# EAGLE board picostepknobs_dispoffset (EAGLE 9.6.2)
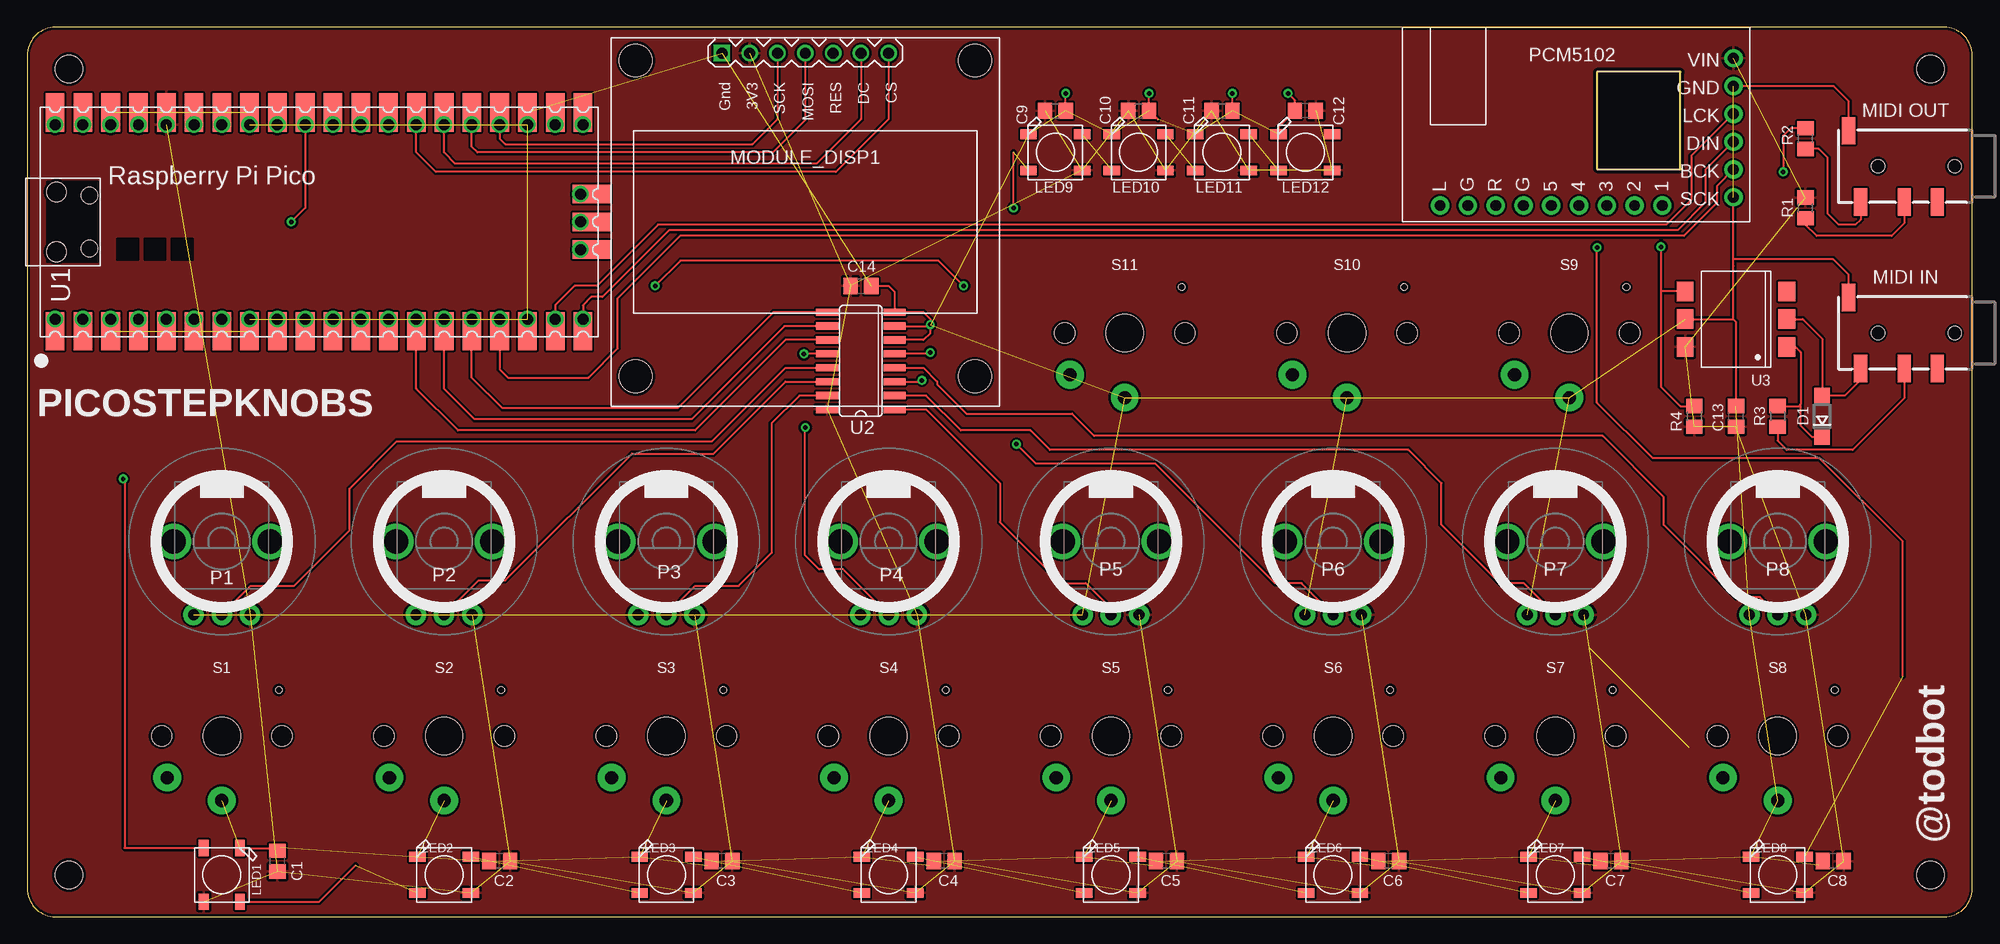
[diagram p0: board, top side]
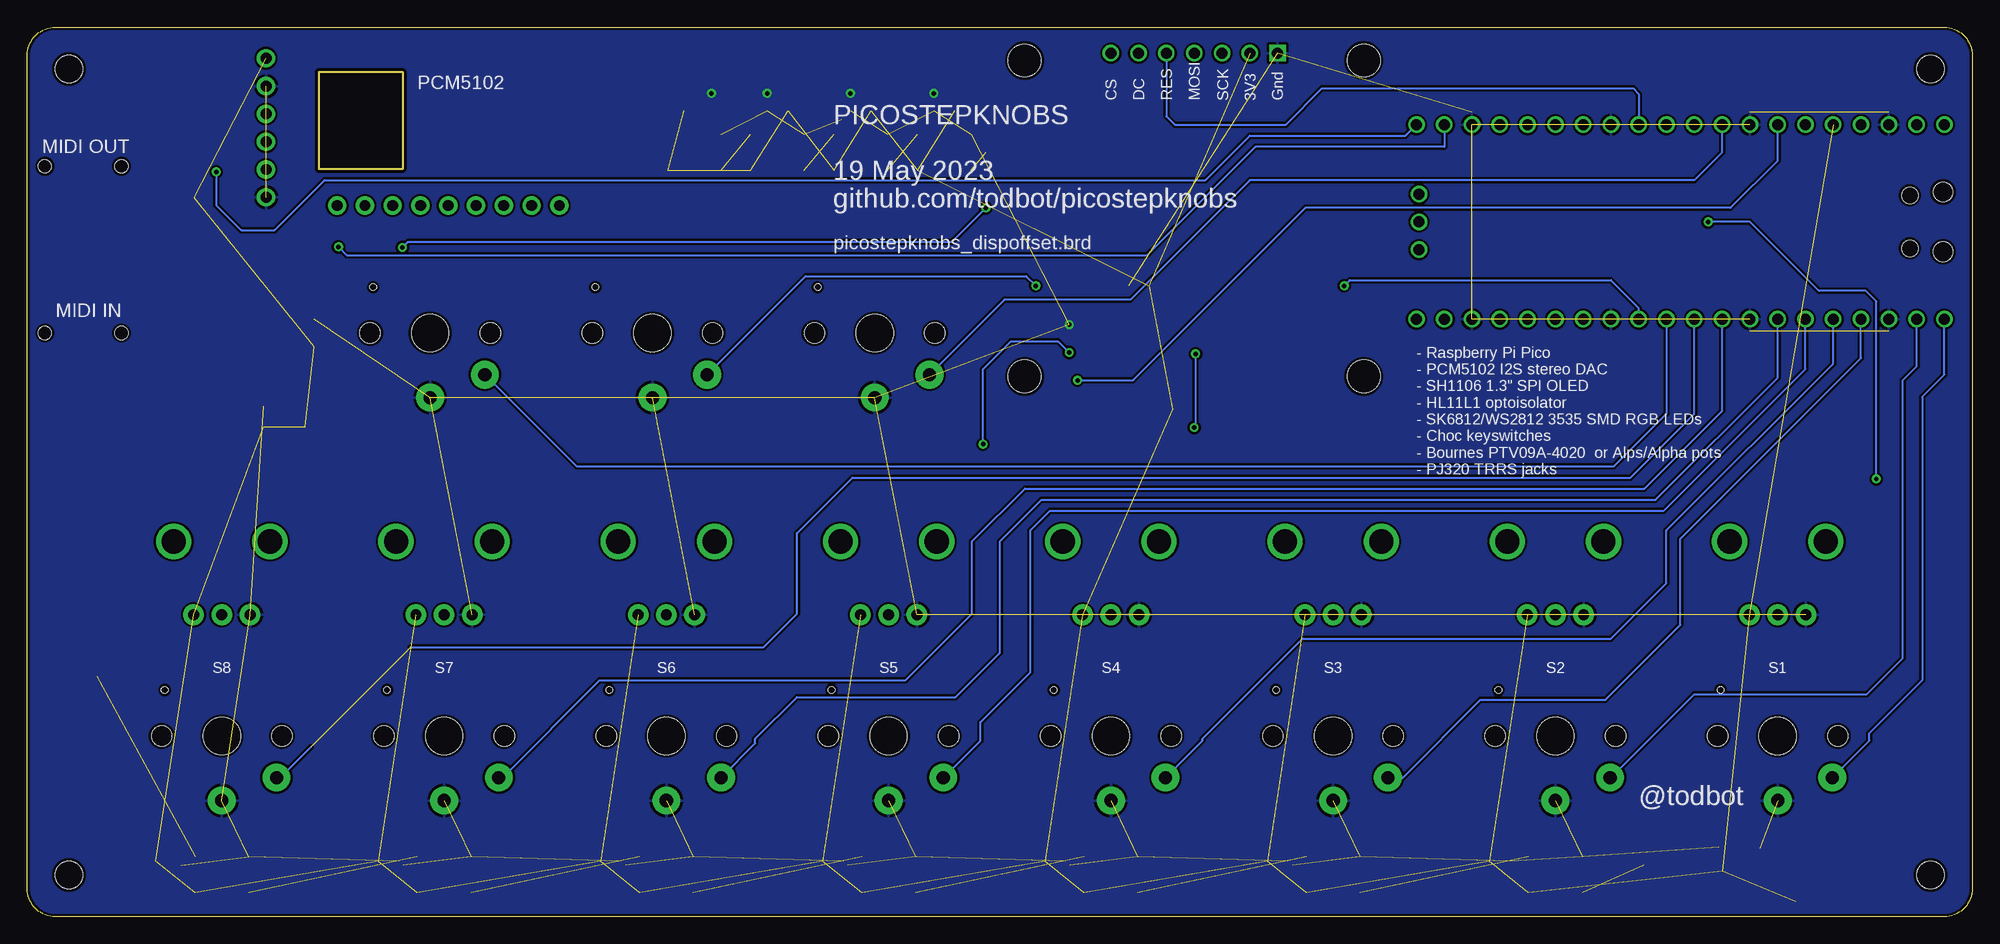
[diagram p1: board, bottom side, seen from below]

Size 177.8 x 81.28 mm. Coordinates in mm from the lower left corner, seen from the top.
Outline: 0,78.74 0,2.54 arc90 2.54,0 175.26,0 arc90 177.8,2.54 177.8,78.74 arc90 175.26,81.28 2.54,81.28 arc90 0,78.74
Outline: 151.13,77.22 143.51,77.22 143.51,68.33 151.13,68.33 151.13,77.22
Copper layers (1*16): Top 0.035mm / dielectric 1.5mm / Bottom 0.035mm
Design rules "adafruit-rules-20180530": minimum track width 8mil, minimum drill 16mil, track to track 8mil, track to pad 8mil, pad to pad 8mil, via to via 8mil, smd to smd 8mil, copper to edge 10mil, drill to drill 8mil, minimum pad ring 10mil, minimum via ring 8mil, stop-mask expansion 4mil, vias tented up to drill 20mil, thermal gap 10mil
Holes 2.54 mm at 3.81,3.81 173.99,3.81 173.99,77.47 3.81,77.47

## Footprints (pad centres in the part's own frame; a part is rotated, then mirrored left to right if it is on the bottom)
C0805 = smd 1.3 x 1.5: 1 -0.95,0; 2 0.95,0
SOD123 = smd 1.4 x 1.4: A 1.9,0; C -1.9,0
PJ-320D_SPARKFUN = smd 1.2 x 2.5: EARTH 11.3,-3.25; RING1 6.2,3.25; RING2 3.2,3.25; TIP 10.2,3.25 | hole 1.2: 1.6,0; 8.6,0
WS2812B = smd 1.5 x 0.9: 1-VDD 2.45,-1.65; 2-DOUT 2.45,1.65; 3-GND -2.45,1.65; 4-DIN -2.45,-1.65
DISPLAY-OLED-128X64-1.3IN = drill 1 square: 1 -7.62,15.43 | drill 1: 2 -5.08,15.43; 3 -2.54,15.43; 4 0,15.43; 5 2.54,15.43; 6 5.08,15.43; 7 7.62,15.43 | hole 3: -15.5,14.75; 15.5,14.75; 15.5,-14.115; -15.5,-14.115
I2S_PCM_5100_SOUNDCARD = drill 1 pad 1.676: 1 1.5,8; 2 1.5,10.54; 3 1.5,13.08; 4 1.5,15.62; 5 1.5,18.16; BCK 4.79,1.5; DIN 7.33,1.5; G1 1.5,20.7; G2 1.5,25.78; GND 12.41,1.5; L 1.5,28.32; LCK 9.87,1.5; R 1.5,23.24; SCK 2.25,1.5; VIN 14.95,1.5
OG-POTS_ALPS_POT_VERTICAL_WITHBIGKNOB = drill 1 pad 1.88: P$1 -2.58,-6.7; P$2 0,-6.7; P$3 2.58,-6.7 | drill 2.2 pad 3.175: P$4 4.4,0; P$5 -4.4,0
R0805 = smd 1.3 x 1.5: 1 -0.95,0; 2 0.95,0
CHOC-1U = drill 1.2 pad 2.54: CHOC1 0,5.9; CHOC2 5,3.8 | hole 3.4: 0,0 | hole 0.6: -5.22,-4.2 | hole 1.85: -5.5,0; 5.5,0
PICO-PKG = drill 1: 1 -8.89,24.13; 2 -8.89,21.59; 3 -8.89,19.05; 4 -8.89,16.51; 5 -8.89,13.97; 6 -8.89,11.43; 7 -8.89,8.89; 8 -8.89,6.35; 9 -8.89,3.81; 10 -8.89,1.27; 11 -8.89,-1.27; 12 -8.89,-3.81; 13 -8.89,-6.35; 14 -8.89,-8.89; 15 -8.89,-11.43; 16 -8.89,-13.97; 17 -8.89,-16.51; 18 -8.89,-19.05; 19 -8.89,-21.59; 20 -8.89,-24.13; 21 8.89,-24.13; 22 8.89,-21.59; 23 8.89,-19.05; 24 8.89,-16.51; 25 8.89,-13.97; 26 8.89,-11.43; 27 8.89,-8.89; 28 8.89,-6.35; 29 8.89,-3.81; 30 8.89,-1.27; 31 8.89,1.27; 32 8.89,3.81; 33 8.89,6.35; 34 8.89,8.89; 35 8.89,11.43; 36 8.89,13.97; 37 8.89,16.51; 38 8.89,19.05; 39 8.89,21.59; 40 8.89,24.13; 41 -2.54,-23.9; 42 0,-23.9; 43 2.54,-23.9 | smd 3.5 x 1.7: P$1 -10,24.13; P$2 -10,21.59; P$3 -10,19.05; P$4 -10,16.51; P$5 -10,13.97; P$6 -10,11.43; P$7 -10,8.89; P$8 -10,6.35; P$9 -10,3.81; P$10 -10,1.27; P$11 -10,-1.27; P$12 -10,-3.81; P$13 -10,-6.35; P$14 -10,-8.89; P$15 -10,-11.43; P$16 -10,-13.97; P$17 -10,-16.51; P$18 -10,-19.05; P$19 -10,-21.59; P$20 -10,-24.13; P$21 10,-24.13; P$22 10,-21.59; P$23 10,-19.05; P$24 10,-16.51; P$25 10,-13.97; P$26 10,-11.43; P$27 10,-8.89; P$28 10,-6.35; P$29 10,-3.81; P$30 10,-1.27; P$31 10,1.27; P$32 10,3.81; P$33 10,6.35; P$34 10,8.89; P$35 10,11.43; P$36 10,13.97; P$37 10,16.51; P$38 10,19.05; P$39 10,21.59; P$40 10,24.13 | smd 1.7 x 3.5: P$41 -2.54,-24.925; P$42 0,-24.925; P$43 2.54,-24.925 | hole 1.8: -2.725,24; 2.725,24 | hole 1.5: -2.425,20.97; 2.425,20.97
SO16 = smd 0.66 x 2.032: 1 -4.445,-3.073; 2 -3.175,-3.073; 3 -1.905,-3.073; 4 -0.635,-3.073; 5 0.635,-3.073; 6 1.905,-3.073; 7 3.175,-3.073; 8 4.445,-3.073; 9 4.445,3.073; 10 3.175,3.073; 11 1.905,3.073; 12 0.635,3.073; 13 -0.635,3.073; 14 -1.905,3.073; 15 -3.175,3.073; 16 -4.445,3.073
DIL6-SMD = smd 1.78 x 1.52: 1 -2.54,-4.645; 2 0,-4.645; 3 2.54,-4.645; 4 2.54,4.645; 5 0,4.645; 6 -2.54,4.645

## Placement (x,y rotation side)
C1  100n  [C0805]  22.86,5.08 90 top
C2  100n  [C0805]  43.18,5.08 180 top
C3  100n  [C0805]  63.5,5.08 180 top
C4  100n  [C0805]  83.82,5.08 180 top
C5  100n  [C0805]  104.14,5.08 180 top
C6  100n  [C0805]  124.46,5.08 180 top
C7  100n  [C0805]  144.78,5.08 180 top
C8  100n  [C0805]  165.1,5.08 180 top
C9  100n  [C0805]  93.98,73.66 0 top
C10  100n  [C0805]  101.6,73.66 0 top
C11  100n  [C0805]  109.22,73.66 0 top
C12  100n  [C0805]  116.84,73.66 180 top
C13  100n  [C0805]  156.21,45.72 90 top
C14  100n  [C0805]  76.2,57.66 0 top
D1  1N4148  [SOD123]  164.08,45.72 90 top
J1  AUDIO-JACK-TRRS  [PJ-320D_SPARKFUN]  177.8,68.58 180 top
J2  AUDIO-JACK-TRRS  [PJ-320D_SPARKFUN]  177.8,53.34 180 top
LED1  WS2812B5050  [WS2812B]  17.78,3.81 270 top
LED2  WS2812B5050  [WS2812B]  38.1,3.81 0 top
LED3  WS2812B5050  [WS2812B]  58.42,3.81 0 top
LED4  WS2812B5050  [WS2812B]  78.74,3.81 0 top
LED5  WS2812B5050  [WS2812B]  99.06,3.81 0 top
LED6  WS2812B5050  [WS2812B]  119.38,3.81 0 top
LED7  WS2812B5050  [WS2812B]  139.7,3.81 0 top
LED8  WS2812B5050  [WS2812B]  160.02,3.81 0 top
LED9  WS2812B5050  [WS2812B]  93.98,69.85 0 top
LED10  WS2812B5050  [WS2812B]  101.6,69.85 0 top
LED11  WS2812B5050  [WS2812B]  109.22,69.85 0 top
LED12  WS2812B5050  [WS2812B]  116.84,69.85 0 top
MODULE_DISP1  DISPLAY-OLED-128X64-1.3IN  [DISPLAY-OLED-128X64-1.3IN]  71.12,63.5 0 top
MODULE_PCM5102A  I2S_PCM_51XX_SOUNDCARD  [I2S_PCM_5100_SOUNDCARD]  157.48,63.5 90 top
P1  10k  [OG-POTS_ALPS_POT_VERTICAL_WITHBIGKNOB]  17.78,34.29 0 top
P2  10k  [OG-POTS_ALPS_POT_VERTICAL_WITHBIGKNOB]  38.1,34.29 0 top
P3  10k  [OG-POTS_ALPS_POT_VERTICAL_WITHBIGKNOB]  58.42,34.29 0 top
P4  10k  [OG-POTS_ALPS_POT_VERTICAL_WITHBIGKNOB]  78.74,34.29 0 top
P5  10k  [OG-POTS_ALPS_POT_VERTICAL_WITHBIGKNOB]  99.06,34.29 0 top
P6  10k  [OG-POTS_ALPS_POT_VERTICAL_WITHBIGKNOB]  119.38,34.29 0 top
P7  10k  [OG-POTS_ALPS_POT_VERTICAL_WITHBIGKNOB]  139.7,34.29 0 top
P8  10k  [OG-POTS_ALPS_POT_VERTICAL_WITHBIGKNOB]  160.02,34.29 0 top
R1  33  [R0805]  162.56,64.77 90 top
R2  10  [R0805]  162.56,71.12 90 top
R3  220  [R0805]  160.02,45.72 270 top
R4  4.7k  [R0805]  152.4,45.72 90 top
S1  KEYSWITCH-PLAIN-CHOC-1U  [CHOC-1U]  17.78,16.51 180 top
S2  KEYSWITCH-PLAIN-CHOC-1U  [CHOC-1U]  38.1,16.51 180 top
S3  KEYSWITCH-PLAIN-CHOC-1U  [CHOC-1U]  58.42,16.51 180 top
S4  KEYSWITCH-PLAIN-CHOC-1U  [CHOC-1U]  78.74,16.51 180 top
S5  KEYSWITCH-PLAIN-CHOC-1U  [CHOC-1U]  99.06,16.51 180 top
S6  KEYSWITCH-PLAIN-CHOC-1U  [CHOC-1U]  119.38,16.51 180 top
S7  KEYSWITCH-PLAIN-CHOC-1U  [CHOC-1U]  139.7,16.51 180 top
S8  KEYSWITCH-PLAIN-CHOC-1U  [CHOC-1U]  160.02,16.51 180 top
S9  KEYSWITCH-PLAIN-CHOC-1U  [CHOC-1U]  140.97,53.34 180 top
S10  KEYSWITCH-PLAIN-CHOC-1U  [CHOC-1U]  120.65,53.34 180 top
S11  KEYSWITCH-PLAIN-CHOC-1U  [CHOC-1U]  100.33,53.34 180 top
U1  RASPBERRY_PICOSMD-TH  [PICO-PKG]  26.67,63.5 90 top
U2  4051D  [SO16]  76.2,50.8 90 top
U3  H11L1MS  [DIL6-SMD]  156.21,54.61 90 top

## Library data of the parts
C1-C14 = rcl; SPICEPREFIX: C
D1 = diode
J1 J2 = audio_jacks_todbot; LCSC: C431535; MPN: PJ-320D
LED1-LED12 MODULE_DISP1 = todstuff2023
MODULE_PCM5102A = PCM5102A
P1-P8 = EurorackModularParts
R1-R4 = rcl; SPICEPREFIX: R
S1-S11 = Keyboard
U1 = RpiPico
U2 = 40xx
U3 = optocoupler; LCSC: C78589; MPN2: H11L1S; OC_FARNELL: unknown; OC_NEWARK: unknown

## Nets
+3V3: C1.1 C2.1 C3.1 C4.1 C5.1 C6.1 C7.1 C8.1 C9.1 C10.1 C11.1 C12.1 C13.1 C14.1 LED1.1-VDD LED2.1-VDD LED3.1-VDD LED4.1-VDD LED5.1-VDD LED6.1-VDD LED7.1-VDD LED8.1-VDD LED9.1-VDD LED10.1-VDD LED11.1-VDD LED12.1-VDD MODULE_DISP1.2 MODULE_PCM5102A.VIN P1.P$3 P2.P$3 P3.P$3 P4.P$3 P5.P$3 P6.P$3 P7.P$3 P8.P$3 R1.2 R4.1 U1.36 U1.P$36 U2.16 U3.6
DISP_CS: MODULE_DISP1.7 U1.27 U1.P$27
DISP_DC: MODULE_DISP1.6 U1.26 U1.P$26
DISP_MOSI: MODULE_DISP1.4 U1.25 U1.P$25
DISP_RES: MODULE_DISP1.5 U1.29 U1.P$29
DISP_SCLK: MODULE_DISP1.3 U1.24 U1.P$24
GND: C1.2 C2.2 C3.2 C4.2 C5.2 C6.2 C7.2 C8.2 C9.2 C10.2 C11.2 C12.2 C13.2 C14.2 J1.EARTH J2.EARTH LED1.3-GND LED2.3-GND LED3.3-GND LED4.3-GND LED5.3-GND LED6.3-GND LED7.3-GND LED8.3-GND LED9.3-GND LED10.3-GND LED11.3-GND LED12.3-GND MODULE_DISP1.1 MODULE_PCM5102A.GND MODULE_PCM5102A.SCK P1.P$1 P2.P$1 P3.P$1 P4.P$1 P5.P$1 P6.P$1 P7.P$1 P8.P$1 S1.CHOC1 S2.CHOC1 S3.CHOC1 S4.CHOC1 S5.CHOC1 S6.CHOC1 S7.CHOC1 S8.CHOC1 S9.CHOC1 S10.CHOC1 S11.CHOC1 U1.3 U1.8 U1.13 U1.18 U1.23 U1.28 U1.33 U1.38 U1.P$3 U1.P$8 U1.P$13 U1.P$18 U1.P$23 U1.P$28 U1.P$33 U1.P$38 U2.6 U2.7 U2.8 U3.5
I2S_BCLK: MODULE_PCM5102A.BCK U1.17 U1.P$17
I2S_DIN: MODULE_PCM5102A.DIN U1.20 U1.P$20
I2S_LCK: MODULE_PCM5102A.LCK U1.19 U1.P$19
MIDI_IN: R4.2 U1.22 U1.P$22 U3.4
MIDI_OUT: R2.2 U1.21 U1.P$21
N$1: LED1.2-DOUT LED2.4-DIN
N$2: LED2.2-DOUT LED3.4-DIN
N$3: U1.37 U1.P$37
N$4: LED3.2-DOUT LED4.4-DIN
N$5: U1.30 U1.P$30
N$6: U1.35 U1.P$35
N$7: U1.40 U1.P$40
N$8: U1.39 U1.P$39
N$9: J1.TIP R2.1
N$10: LED4.2-DOUT LED5.4-DIN
N$11: LED5.2-DOUT LED6.4-DIN
N$12: LED6.2-DOUT LED7.4-DIN
N$13: LED7.2-DOUT LED8.4-DIN
N$14: LED9.2-DOUT LED10.4-DIN
N$15: LED10.2-DOUT LED11.4-DIN
N$16: LED11.2-DOUT LED12.4-DIN
N$17: LED8.2-DOUT LED9.4-DIN
N$18: U1.41 U1.P$41
N$19: U1.42 U1.P$42
N$20: U1.43 U1.P$43
N$38: J1.RING1 R1.1
N$47: D1.C R3.1 U3.1
N$48: D1.A J2.TIP U3.2
N$49: J2.RING1 R3.2
NEOPIXEL: LED1.4-DIN U1.31 U1.P$31
POT1: P1.P$2 U2.13
POT2: P2.P$2 U2.14
POT3: P3.P$2 U2.15
POT4: P4.P$2 U2.12
POT5: P5.P$2 U2.1
POT6: P6.P$2 U2.5
POT7: P7.P$2 U2.2
POT8: P8.P$2 U2.4
POT_IN: U1.34 U1.P$34 U2.3
POTSELA: U1.14 U1.P$14 U2.11
POTSELB: U1.15 U1.P$15 U2.10
POTSELC: U1.16 U1.P$16 U2.9
SW1: S1.CHOC2 U1.1 U1.P$1
SW2: S2.CHOC2 U1.2 U1.P$2
SW3: S3.CHOC2 U1.4 U1.P$4
SW4: S4.CHOC2 U1.5 U1.P$5
SW5: S5.CHOC2 U1.6 U1.P$6
SW6: S6.CHOC2 U1.7 U1.P$7
SW7: S7.CHOC2 U1.9 U1.P$9
SW8: S8.CHOC2 U1.10 U1.P$10
SW9: S9.CHOC2 U1.11 U1.P$11
SW10: S10.CHOC2 U1.12 U1.P$12
SW11: S11.CHOC2 U1.32 U1.P$32

## Tracks (layer width: path | path; a pad name or v marks a point on that pad's centre or on a via)
+3V3  (40 unrouted)
  Top 0.203: U1.P$36 U1.36
  pour Top: 178.06,81.36 178.06,0.25 -0.4,0.25 -0.4,81.36
DISP_CS
  Top 0.203: U1.P$27 U1.27 35.56,69.85 37.34,68.07 73.91,68.07 78.74,72.9 MODULE_DISP1.7
DISP_DC
  Top 0.203: U1.P$26 U1.26 38.1,69.85 39.12,68.83 72.14,68.83 76.2,72.9 MODULE_DISP1.6
DISP_MOSI
  Top 0.203: U1.P$25 U1.25 40.64,70.36 41.15,69.85 68.17,69.85 71.12,72.8 MODULE_DISP1.4
DISP_RES
  Top 0.203: U1.P$29 U1.29
  Bottom 0.203: MODULE_DISP1.5 73.66,73.15 72.9,72.39 62.74,72.39 59.44,75.69 30.99,75.69 30.48,75.18 U1.29
DISP_SCLK
  Top 0.203: U1.24 U1.P$24 43.18,71.12 43.69,70.61 66.29,70.61 68.58,72.9 MODULE_DISP1.3
GND  (via drill 0.41)  (52 unrouted)
  Top 0.203: C3.2 62.16,4.68 | C4.2 82.47,4.68 | C5.2 102.8,4.68 | C6.2 123.11,4.68 | C7.2 143.44,4.68 | C8.2 163.75,4.68 | U1.P$23 U1.23 | U1.P$28 U1.28 | U1.P$38 U1.38 | U1.P$33 U1.33 | U1.P$3 U1.3 | U1.P$8 U1.8 | U1.P$18 U1.18 | U1.P$13 U1.13 | J1.EARTH 166.5,74.55 165.14,75.91 MODULE_PCM5102A.GND | v82.55,54.1 82.55,53.34 81.92,52.7 U2.6 | v82.55,54.1 82.55,54.61 81.92,55.24 U2.8 79.27,57.12 78.74,57.66 C14.2 | 155.98,60.07 155.98,59.46 155.96,59.44 155.96,54.61 | 155.98,60.07 MODULE_PCM5102A.SCK | J2.EARTH 166.5,58.67 165.1,60.07 155.98,60.07 | 103.35,72.86 C10.2 v102.55,75.25 | C11.2 v110.17,75.25 | C9.2 v94.93,75.25 | 155.96,54.61 156.21,54.36 C13.2 | U3.5 155.96,54.61 | U2.7 82.42,53.98 v82.55,54.1 | LED1.3-GND 22.63,6.26 C1.2 23.18,6.35 | v115.25,75.25 115.89,74.61 C12.2 114.39,72.16 LED12.3-GND
  pour Bottom: 0,86.17 180.34,86.17 180.34,0.25 0,0.25
I2S_BCLK
  Top 0.203: U1.17 U1.P$17 43.18,50.04 43.94,49.28 51.31,49.28 53.98,51.94 53.98,56.52 59.69,62.23 151.44,62.23 154.46,65.25 154.46,66.77 MODULE_PCM5102A.BCK
I2S_DIN
  Top 0.203: MODULE_PCM5102A.DIN 153.42,68.27 153.42,65.28 150.88,62.74 58.67,62.74 52.58,56.64 51.56,56.64 50.8,55.88 U1.20 U1.P$20
I2S_LCK
  Top 0.203: U1.P$19 U1.19 48.26,55.88 50.04,57.66 52.07,57.66 57.66,63.25 149.86,63.25 152.15,65.53 152.15,69.54 MODULE_PCM5102A.LCK
MIDI_IN  (via drill 0.41)
  Top 0.203: U1.P$22 U1.22 | v149.35,61.21 149.35,57.15 | 149.35,57.15 149.35,48.45 151.13,46.67 R4.2 | U3.4 149.35,57.15
  Bottom 0.203: v149.35,61.21 148.59,60.45 75.44,60.45 65.53,70.36 48.26,70.36 U1.22
MIDI_OUT  (via drill 0.41)
  Top 0.203: U1.P$21 U1.21 | R2.2 161.22,72.07 160.53,71.37 v160.53,68.07
  Bottom 0.203: U1.21 51.82,71.37 66.04,71.37 70.1,67.31 150.62,67.31 155.19,62.74 158.24,62.74 160.53,65.02 v160.53,68.07
N$1  (1 unrouted)
  Top 0.203: LED1.2-DOUT 26.68,1.36 30,4.68
N$2  (1 unrouted)
N$3
  Top 0.203: U1.P$37 U1.37
N$4  (1 unrouted)
N$5
  Top 0.203: U1.P$30 U1.30
N$6
  Top 0.203: U1.P$35 U1.35
N$7
  Top 0.203: U1.P$40 U1.40
N$8
  Top 0.203: U1.P$39 U1.39
N$9
  Top 0.203: J1.TIP 167.6,63.71 167.13,63.25 165.61,63.25 164.59,64.26 164.59,69.34 163.76,70.17 R2.1
N$10  (1 unrouted)
N$11  (1 unrouted)
N$12  (1 unrouted)
N$13  (1 unrouted)
N$14  (1 unrouted)
N$15  (1 unrouted)
N$16  (1 unrouted)
N$17  (via drill 0.41)  (2 unrouted)
  Top 0.203: 171.45,21.98 171.45,34.29 163.83,41.91 148.59,41.91 143.51,46.99 v143.51,61.16 | v90.17,64.77 90.17,69.85
  Bottom 0.203: v143.51,61.16 143,61.67 93.27,61.67 v90.17,64.77
N$18
  Top 0.203: U1.P$41 U1.41
N$19
  Top 0.203: U1.P$42 U1.42
N$20
  Top 0.203: U1.P$43 U1.43
N$38
  Top 0.203: J1.RING1 171.6,63.4 170.43,62.23 163.58,62.23 162.56,63.25 R1.1
N$47
  Top 0.203: R3.1 161.99,46.67 162.12,46.81 | 162.12,46.81 162.12,51.56 161.62,52.07 U3.1 | D1.C 163.19,43.82 162.12,44.88 162.12,46.81
N$48
  Top 0.203: J2.TIP 167.6,49.07 166.15,47.62 D1.A 164.08,52.83 162.31,54.61 U3.2
N$49
  Top 0.203: J2.RING1 171.6,47.39 166.88,42.67 160.85,42.67 160.02,43.5 R3.2
NEOPIXEL  (via drill 0.41)
  Top 0.203: v8.76,40.01 8.89,39.88 8.89,6.26 LED1.4-DIN | U1.P$31 U1.31 25.4,64.77 v24.13,63.5
  Bottom 0.203: v8.76,40.01 8.76,56.23 9.72,57.19 14.01,57.19 20.32,63.5 v24.13,63.5
POT1
  Top 0.203: P1.P$2 20.42,30.23 24.38,30.23 29.46,35.31 29.46,39.12 33.78,43.43 62.59,43.43 69.32,50.16 U2.13
POT2
  Top 0.203: P2.P$2 41.24,30.73 43.69,30.73 55.28,42.32 62.74,42.32 69.32,48.9 U2.14
POT3
  Top 0.203: P3.P$2 61.06,30.23 65.02,30.23 68.05,33.25 68.05,45.09 70.59,47.62 U2.15
POT4  (via drill 0.41)
  Top 0.203: U2.12 v70.99,51.44 | P4.P$2 74.58,31.75 72.39,31.75 71.12,33.02 v71.12,44.7
  Bottom 0.203: v70.99,51.44 70.99,44.83 v71.12,44.7
POT5
  Top 0.203: U2.1 82.17,46.35 88.9,39.62 88.9,36.07 94.49,30.48 96.77,30.48 99.06,28.19 P5.P$2
POT6  (via drill 0.41)
  Top 0.203: P6.P$2 116.49,30.48 114.05,30.48 103.12,41.4 92.2,41.4 v90.42,43.18 | v82.55,51.56 82.42,51.44 U2.5
  Bottom 0.203: v90.42,43.18 90.42,50.04 87.88,52.58 83.57,52.58 v82.55,51.56
POT7
  Top 0.203: P7.P$2 136.81,30.48 134.62,30.48 129.29,35.81 129.29,39.62 126.24,42.67 93.47,42.67 91.69,44.45 85.34,44.45 82.17,47.62 U2.2
POT8
  Top 0.203: P8.P$2 158.4,29.21 156.21,29.21 149.61,35.81 149.61,38.35 144.02,43.94 97.54,43.94 95.5,45.97 85.85,45.97 83.19,48.64 83.19,48.9 81.92,50.16 U2.4
POT_IN  (via drill 0.41)
  Top 0.203: U1.P$34 U1.34 | U2.3 81.66,48.9 v81.79,49.02
  Bottom 0.203: U1.34 17.78,69.09 22.1,64.77 60.96,64.77 76.71,49.02 v81.79,49.02
POTSELA
  Top 0.203: U1.14 U1.P$14 35.56,48.26 39.37,44.45 61.06,44.45 69.32,52.7 U2.11
POTSELB
  Top 0.203: U1.15 U1.P$15 38.1,48.26 40.89,45.47 60.71,45.47 69.22,53.98 U2.10
POTSELC
  Top 0.203: U1.16 U1.P$16 40.64,49.28 43.43,46.48 59.44,46.48 68.2,55.24 U2.9
SW1
  Top 0.203: U1.P$1 U1.1
  Bottom 0.203: U1.1 2.54,49.53 4.57,47.5 4.57,21.59 9.4,16.76 9.4,16.09 S1.CHOC2
SW2
  Top 0.203: U1.P$2 U1.2
  Bottom 0.203: S2.CHOC2 33.01,12.71 25.4,20.32 9.65,20.32 6.35,23.62 6.35,49.02 5.08,50.29 U1.2
SW3
  Top 0.203: U1.P$4 U1.4
  Bottom 0.203: S3.CHOC2 52.06,12.71 44.96,19.81 33.53,19.81 26.67,26.67 26.67,34.54 10.16,51.05 U1.4
SW4
  Top 0.203: U1.P$5 U1.5
  Bottom 0.203: S4.CHOC2 70.36,16.09 70.36,16.26 61.21,25.4 33.02,25.4 27.94,30.48 27.94,35.31 12.7,50.55 U1.5
SW5
  Top 0.203: U1.P$6 U1.6
  Bottom 0.203: S5.CHOC2 90.68,16.09 90.68,17.78 86.11,22.35 86.11,35.31 84.33,37.08 28.19,37.08 15.24,50.04 U1.6
SW6
  Top 0.203: U1.P$7 U1.7
  Bottom 0.203: S6.CHOC2 111.25,15.84 111.25,16.26 107.44,20.07 92.96,20.07 88.9,24.13 88.9,34.29 85.09,38.1 28.96,38.1 17.78,49.28 U1.7
SW7
  Top 0.203: U1.P$9 U1.9
  Bottom 0.203: S7.CHOC2 134.36,12.71 125.48,21.59 97.54,21.59 91.44,27.69 91.44,34.29 86.61,39.12 29.97,39.12 22.86,46.23 U1.9
SW8  (1 unrouted)
  Top 0.203: U1.P$10 U1.10
  Bottom 0.203: S8.CHOC2 154.68,12.71 151.89,15.49 | 142.75,24.64 110.49,24.64 107.44,27.69 107.44,35.05 102.36,40.13 31.24,40.13 25.4,45.97 U1.10
SW9
  Top 0.203: U1.P$11 U1.11
  Bottom 0.203: U1.11 27.94,45.97 32.77,41.15 127.58,41.15 S9.CHOC2
SW10  (via drill 0.41)
  Top 0.203: U1.P$12 U1.12 | v85.6,57.66 83.29,59.97 59.71,59.97 v57.4,57.66
  Bottom 0.203: v85.6,57.66 86.49,58.55 106.64,58.55 S10.CHOC2 | U1.12 30.48,55.63 33.02,58.17 56.9,58.17 v57.4,57.66
SW11
  Top 0.203: U1.P$32 U1.32
  Bottom 0.203: U1.32 22.86,69.85 25.4,67.31 66.04,67.31 76.96,56.39 88.48,56.39 S11.CHOC2

## Text on the board
tPlace: PCM5102 | Gnd | 3V3 | SCK | MOSI | RES | DC | CS | MIDI OUT | Raspberry Pi Pico | MIDI IN | PICOSTEPKNOBS | @todbot
bPlace: PCM5102 | Gnd | 3V3 | SCK | MOSI | RES | DC | CS | PICOSTEPKNOBS | MIDI OUT | 19 May 2023 | github.com/todbot/picostepknobs | picostepknobs_dispoffset.brd | MIDI IN | - Raspberry Pi Pico / - PCM5102 I2S stereo DAC / - SH1106 1.3" SPI OLED / - HL11L1 optoisolator / - SK6812/WS2812 3535 SMD RGB LEDs / - Choc keyswitches / - Bournes PTV09A-4020 or Alps/Alpha pots / - PJ320 TRRS jacks | @todbot